# Altium PCB EE25_transformer.pcbdoc
Units mil, origin at the board's own origin, x right, y up, seen from the top; angles counter-clockwise.
Board outline 1820 x 2040 mil, 2 copper layers (Top Layer, Bottom Layer); 1 components, 0 nets, 9 pads, 0 vias.
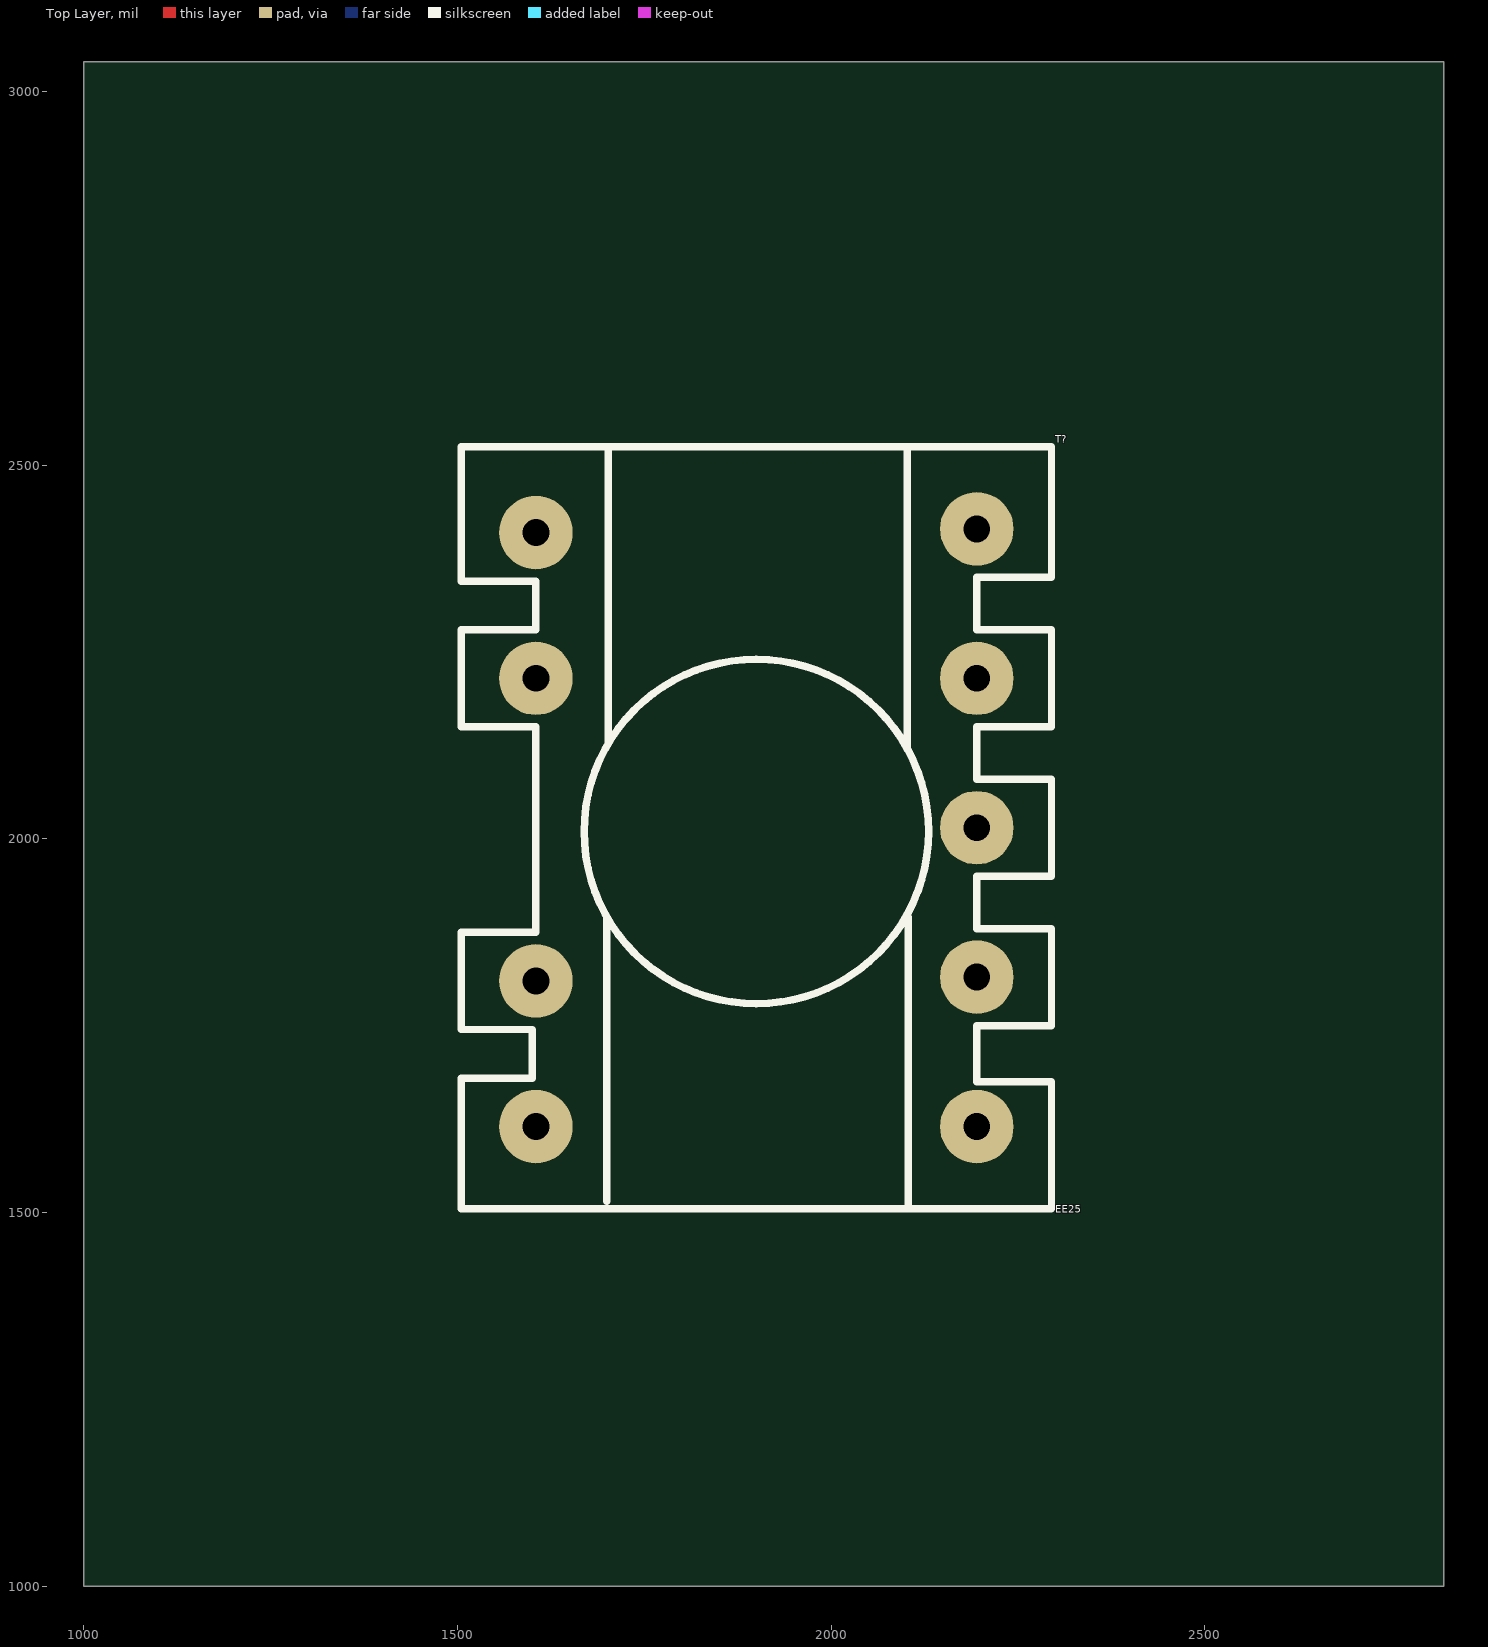
[diagram p0: Top Layer view]
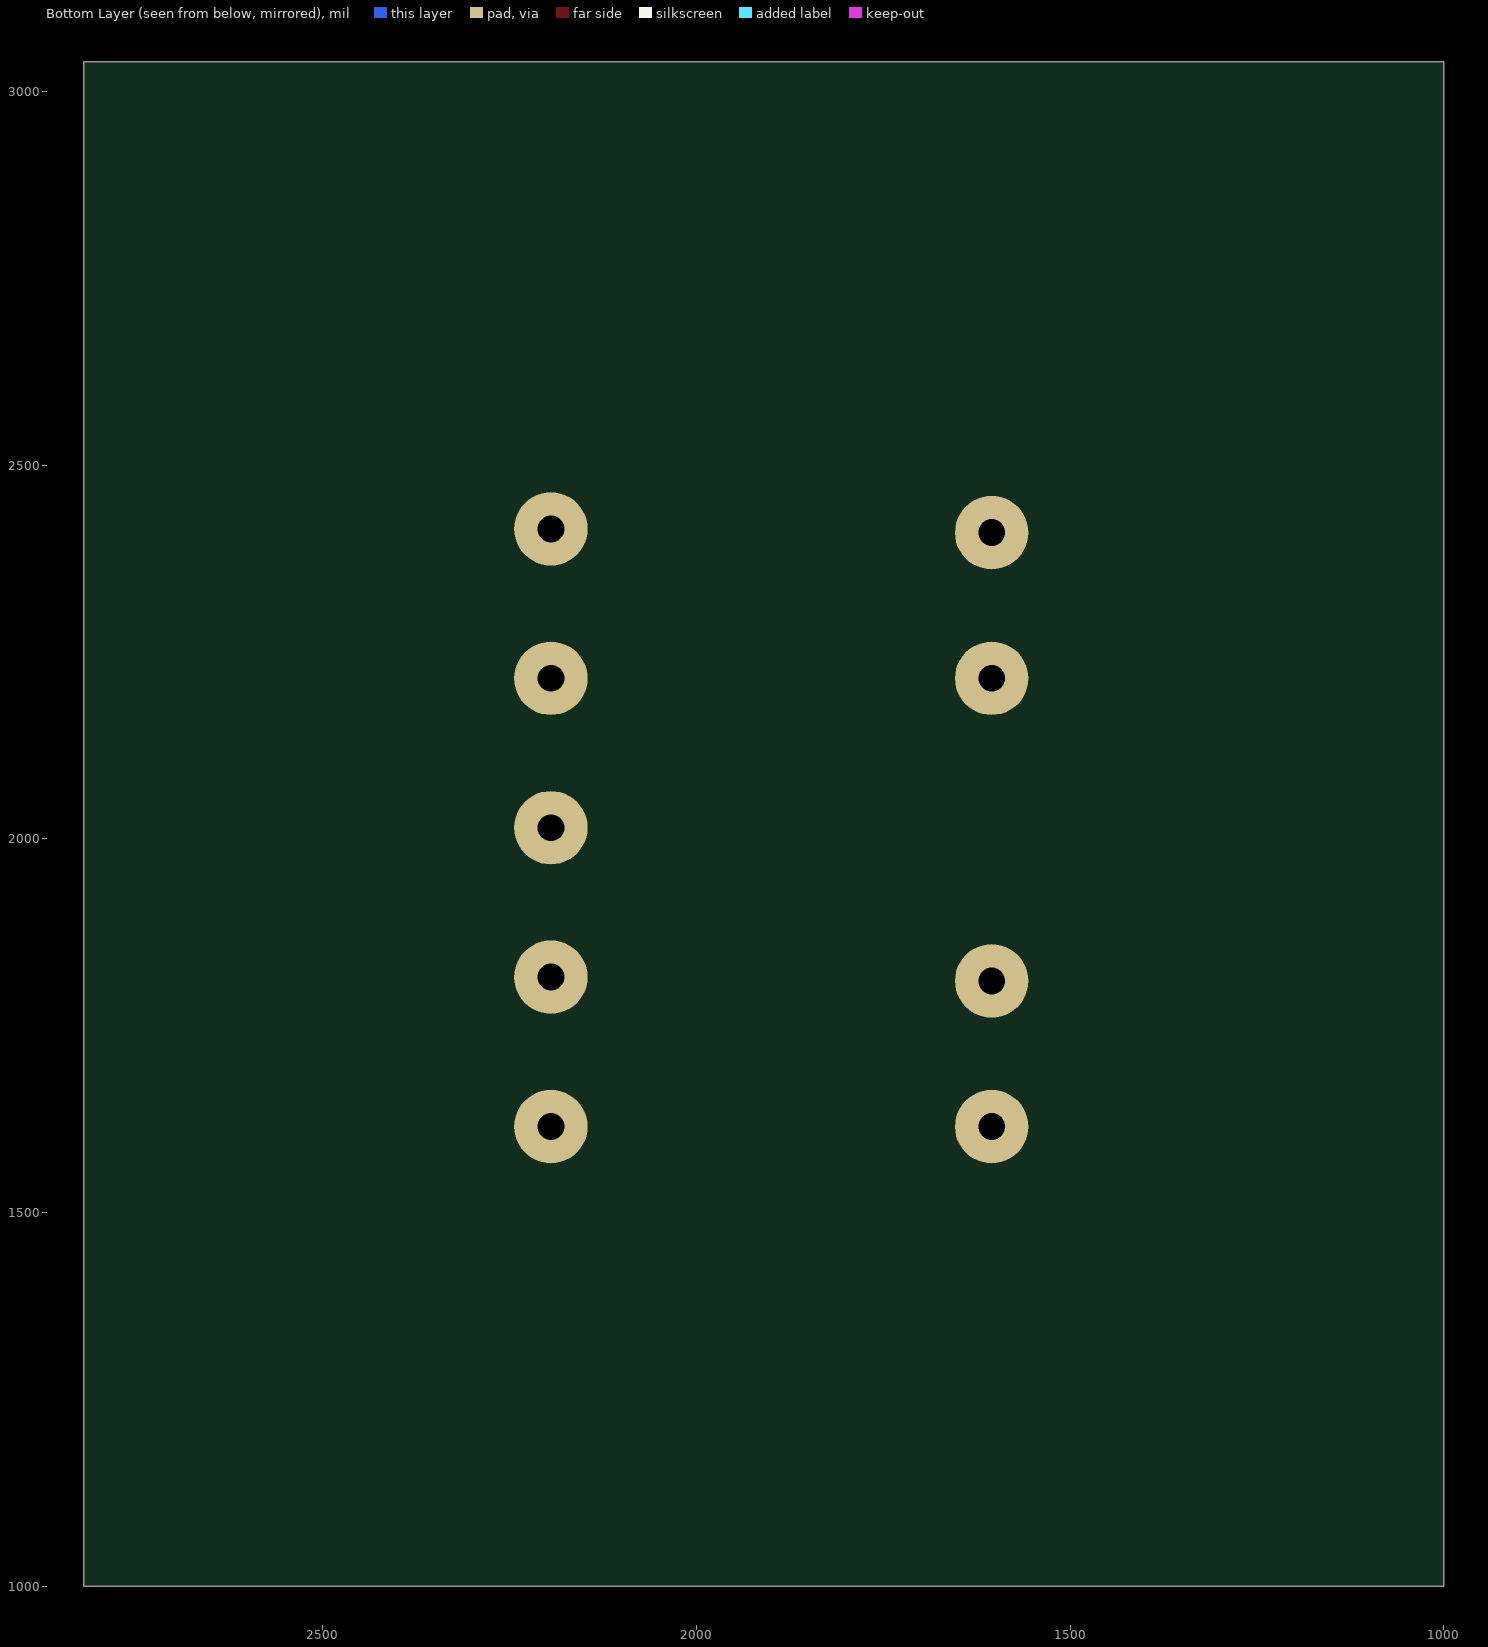
[diagram p1: Bottom Layer view, seen from below]

## Layer stack, top to bottom
Top Layer: signal copper (thickness not stored)
Dielectric: dielectric 12.6, FR-4, Dk 4.8
Bottom Layer: signal copper (thickness not stored)

## Board outline
2820,1000 1000,1000 1000,3040 2820,3040

## Components (designator, comment, footprint, x,y, rotation, side; value= is the part's Value field where it differs from the comment)
T? "EE25" EE25 1900,2015 r0 top

## Footprints (in the part's own frame and the unit in brackets; to place one, negate y for a bottom-side part, rotate by r counter-clockwise, add the part's x,y. Pads: shape width x height; smd on the part's side, far side on the other; paste and mask are expansions set on the pad)
EE25 [mil]
  round 98.42 hole 36 paste+0 mask+2: 1(-295,-400) 2(-295,-205) 3(-295,200) 4(-295,395) 5(295,-400) 6(295,-200) 7(295,0) 8(295,200) 9(295,400)
  silkscreen extent -395,-510 395,510

## Nets (pads, with @x,y where several pads share a name; then routed paths per layer and width w, separated by ;. In a path a pad name is that pad's centre, name@x,y a point inside that pad or via, vN(x,y) a via of type N, cw(c..) or ccw(c..) an arc to the next point about the centre after c; other vN are vias at no path point)
pads on no net: T?.1 T?.2 T?.3 T?.4 T?.5 T?.6 T?.7 T?.8 T?.9

## Silkscreen, mask and mechanical layers (free items; w line width, h text height)
Document:
  lines w0.1: 1909.99,2019.99 1910.01,2020.01